# EAGLE board MagEnc2 (EAGLE 6.1)
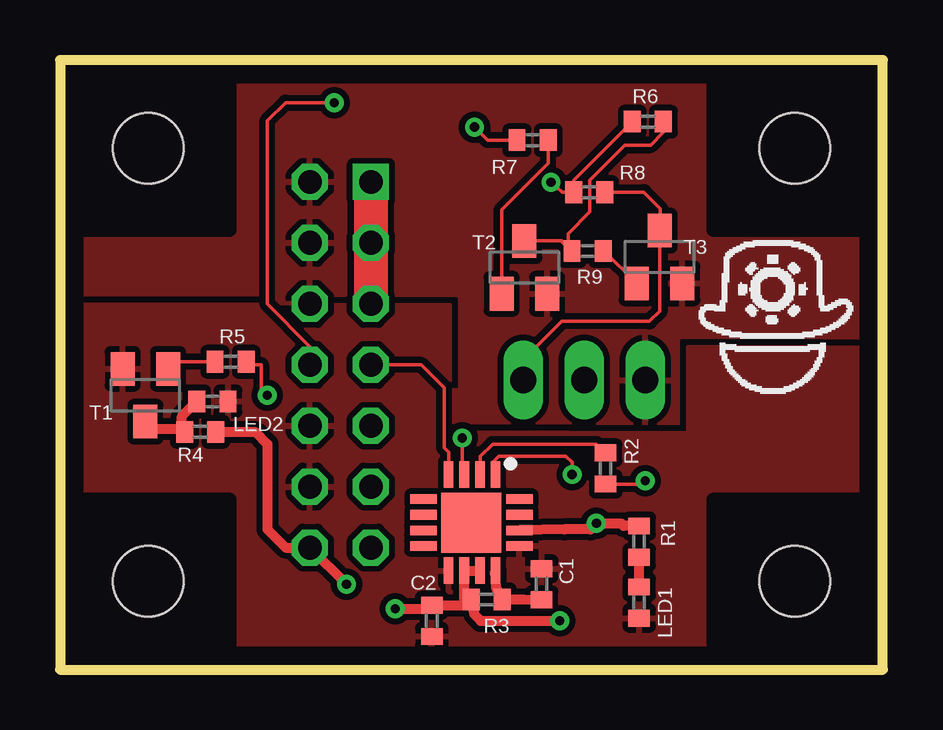
[diagram p0: board, top side]
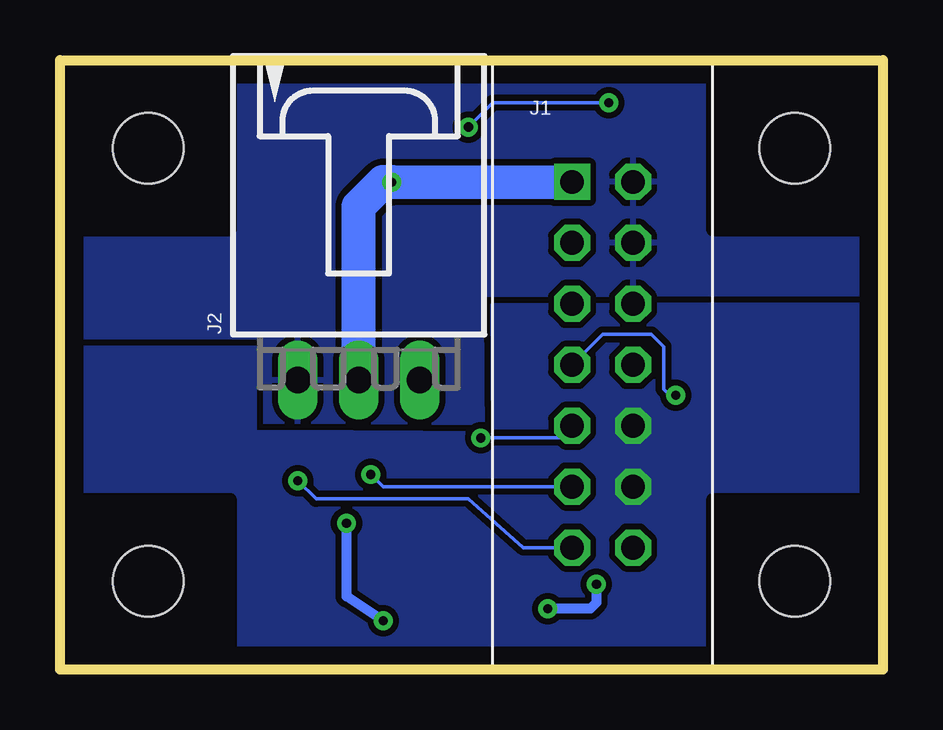
[diagram p1: board, bottom side, seen from below]

Size 34.29 x 25.4 mm. Coordinates in mm from the lower left corner, seen from the top.
Outline: 0,0 34.29,0 34.29,25.4 0,25.4 0,0
Copper layers (1*16): Top 0.035mm / dielectric 1.5mm / Bottom 0.035mm
Design rules: minimum track width 6mil, minimum drill 15mil, track to track 6mil, track to pad 6mil, pad to pad 6mil, via to via 6mil, smd to smd 6mil, copper to edge 30mil, drill to drill 30mil, minimum pad ring 10mil, minimum via ring 8mil, stop-mask expansion 1mil, vias tented up to drill 0mil, thermal gap 10mil
Holes 2.95 mm at 3.68,21.72 30.61,21.72 30.61,3.68 3.68,3.68
tRestrict: area 0,0 to 7.1,7.1; area 27.2,0.3 to 34.3,7.1; area 27.2,18.3 to 34.3,25.4; area 0,18.3 to 7.1,25.4
bRestrict: area 0.3,0.3 to 7.1,7.1; area 0,18.3 to 7.1,25.4; area 27.2,18.3 to 34.3,25.4; area 27.2,0 to 34.3,7.1

## Footprints (pad centres in the part's own frame; a part is rotated, then mirrored left to right if it is on the bottom)
C0402 = smd 0.7 x 0.9: 1 -0.65,0; 2 0.65,0
SBH11-PBPC-D07-ST-BK = drill 0.991 square: 1 0,0 | drill 0.991 octagon: 2 2.54,0; 3 0,-2.54; 4 2.54,-2.54; 5 0,-5.08; 6 2.54,-5.08; 7 0,-7.62; 8 2.54,-7.62; 9 0,-10.16; 10 2.54,-10.16; 11 0,-12.7; 12 2.54,-12.7; 13 0,-15.24; 14 2.54,-15.24
70553-03 = drill 1.092 long: 1 -2.54,-7.62; 2 0,-7.62; 3 2.54,-7.62
R0402 = smd 0.7 x 0.9: 1 -0.65,0; 2 0.65,0
SOT23-BEC = smd 1 x 1.4: B -0.95,-1.1; C 0,1.1; E 0.95,-1.1
AS5055 = smd 1.1 x 0.4: 1 0,1.95; 2 0,1.3; 3 0,0.65; 4 0,0; 9 4,0; 10 4,0.65; 11 4,1.3; 12 4,1.95 | smd 0.4 x 1.1: 5 1.025,-1.05; 6 1.675,-1.05; 7 2.325,-1.055; 8 2.975,-1.055; 13 2.975,2.945; 14 2.325,2.945; 15 1.675,2.95; 16 1.025,2.95 | smd 2.5 x 2.5: EPAD 2,0.95

## Placement (x,y rotation side)
C1  4.7u  [C0402]  20.07,3.56 90 top
C2  100n  [C0402]  15.49,2.03 270 top
J1  SBH11-PBPC-D07-ST-BK  [SBH11-PBPC-D07-ST-BK]  12.95,20.32 0 bottom
J2  70553-0037  [70553-03]  21.84,19.68 0 bottom
LED1  GREEN  [R0402]  24.13,2.79 270 top
LED2  GREEN  [R0402]  6.35,11.18 0 top
R1  680  [R0402]  24.13,5.33 270 top
R2  33  [R0402]  22.73,8.38 270 top
R3  15  [R0402]  17.78,2.92 0 top
R4  1K  [R0402]  5.84,9.91 180 top
R5  1K  [R0402]  7.11,12.83 0 top
R6  1K  [R0402]  24.49,22.83 0 top
R7  1K  [R0402]  19.69,22.06 180 top
R8  1K  [R0402]  22.05,19.89 0 top
R9  1K  [R0402]  21.98,17.44 180 top
T1  MMBT2222A  [SOT23-BEC]  3.56,11.43 180 top
T2  MMBT2222A  [SOT23-BEC]  19.35,16.76 0 top
T3  MMBT2222A  [SOT23-BEC]  24.98,17.19 0 top
U$2  AS5055  [AS5055]  16.2,8.13 270 top

## Library data of the parts
C1 C2 LED1 LED2 R1-R9 = resistor
J1 = SBH11-PBPC-D07-ST-BK
J2 = con-molex; OC_FARNELL: unknown; OC_NEWARK: unknown
T1-T3 = transistor
U$2 = AS5055

## Nets
5V_SERVO: J1.1 J1.3 J1.5 J2.2 R6.1 R8.1
5V_SERVO_CTRL: J2.3 R8.2 T3.C
CSN: J1.7 R5.2 U$2.4
CSN1: R6.2 R9.2 T2.C
DGND: C1.2 C2.2 J1.10 J1.12 LED1.2 LED2.2 T1.E U$2.9 U$2.13
GND: J1.2 J1.4 J1.6 J2.1 T2.E T3.E
MISO: J1.13 R2.2
MOSI: J1.11 U$2.1
N$1: LED1.1 R1.2
N$2: LED2.1 R4.2 T1.C
N$3: R5.1 T1.B
N$4: R2.1 U$2.2
N$6: R7.1 T2.B
N$8: R9.1 T3.B
SCLK: J1.9 U$2.3
SERVO_CTRL: J1.8 R7.2
VCC: C2.1 J1.14 R1.1 R3.1 R4.1 U$2.10 U$2.11 U$2.14
VDD: C1.1 R3.2 U$2.12

## Tracks (layer width: path | path; a pad name or v marks a point on that pad's centre or on a via)
5V_SERVO  (via drill 0.38)
  Top 0.152: R6.1 21.4,20.39 R8.1 20.92,19.89 v20.46,20.31
  Top 1.422: J1.1 J1.3 J1.5
  Bottom 1.422: J2.2 21.84,19.3 20.83,20.32 v20.46,20.31 J1.1
5V_SERVO_CTRL
  Top 0.152: R8.2 24.33,19.89 25.02,19.2 25.02,18.33 T3.C 24.98,14.93 24.56,14.51 20.9,14.51 19.31,12.92 J2.3
CSN  (via drill 0.38)
  Top 0.152: R5.2 7.89,12.7 8.38,12.7 8.38,11.68 v8.64,11.43 | U$2.4 16.2,9.05 16,9.25 16,11.75 15.05,12.7 J1.7
  Bottom 0.152: J1.7 11.68,13.97 9.65,13.97 9.14,13.46 9.14,11.68 8.89,11.43 v8.64,11.43
CSN1
  Top 0.152: T2.C 20.91,17.86 | 20.91,17.86 R9.2 | 20.91,17.86 20.91,17.83 21.17,17.57 21.17,18.16 22.08,19.07 22.08,20.4 23.53,21.85 24.61,21.85 25.14,22.38 25.14,22.8 25.21,22.87 25.21,22.82 25.22,22.81 25.16,22.81 R6.2
DGND
  pour Top (isolate 0.254): 10.71,15.21 16.26,15.21 16.26,9.91 26.16,9.88 26.16,13.46 arc-1 34.17,13.43 34.43,0.02 0.38,0.27 0.38,3.3 0.26,15.21 10.7,15.21
  pour Bottom (isolate 0.254, no thermals): 16.3,15.21 16.26,9.88 22.1,9.91 26.16,9.91 26.16,13.46 34.3,13.43 34.3,-0.11 0.38,0.14 0.38,3.05 0.26,15.21 9.93,15.21
GND
  pour Top (isolate 0.254, rank 2): 0.13,15.24 16.26,15.24 16.26,9.91 26.16,9.91 26.16,13.46 34.54,13.46 34.04,25.4 0.25,25.4
  pour Bottom (isolate 0.254, rank 2): 0.25,25.4 0.25,15.24 16.26,15.24 16.26,9.91 26.16,9.91 26.16,13.46 34.29,13.46 34.29,25.27
MISO  (via drill 0.38)
  Top 0.152: v24.38,7.87 24.27,7.73 R2.2
  Bottom 0.152: J1.13 14.99,5.08 17.27,7.11 23.62,7.11 v24.38,7.87
MOSI  (via drill 0.38)
  Top 0.152: v21.34,8.13 21.34,8.64 21.08,8.89 18.28,8.89 18.03,8.64 18.03,8.21 U$2.1
  Bottom 0.152: J1.11 20.83,7.62 v21.34,8.13
N$1
  Top 0.406: LED1.1 R1.2
N$2
  Top 0.406: 5.08,10.02 R4.2 | 5.08,10.02 3.87,10.02 T1.C | 5.08,10.02 5.08,10.56 LED2.1
N$3
  Top 0.152: R5.1 4.8,12.83 T1.B
N$4
  Top 0.152: U$2.2 17.52,8.16 17.52,8.89 18.03,9.4 22.35,9.4 22.73,9.02 R2.1
N$6
  Top 0.152: T2.B 18.4,19.16 20.34,21.1 R7.1
N$8
  Top 0.152: R9.1 22.68,17.44 T3.B
SCLK  (via drill 0.38)
  Top 0.152: v16.76,9.65 16.76,9.49 16.75,9.49 16.75,8.25 16.84,8.25 U$2.3
  Bottom 0.152: J1.9 13.46,9.65 v16.76,9.65
SERVO_CTRL  (via drill 0.38)
  Top 0.152: J1.8 10.41,13.46 8.64,15.24 8.64,22.86 9.4,23.62 v11.43,23.62 | R7.2 17.82,22.06 v17.27,22.61
  Bottom 0.152: v11.43,23.62 16.26,23.62 v17.27,22.61
VCC  (via drill 0.38)
  Top 0.406: U$2.11 U$2.10 16.84,2.92 R3.1 | 24.14,6.1 R1.1 23.48,5.98 23.37,6.1 v22.35,6.1 22.1,5.84 21.02,5.84 U$2.14 | R4.1 8.13,9.91 8.64,9.4 8.64,5.84 9.4,5.08 J1.14 v11.94,3.56 | v20.83,2.03 17.53,2.03 17.27,2.29 R3.1 | v13.97,2.54 15.35,2.54 C2.1 17.13,2.68 R3.1
  Bottom 0.406: v20.83,2.03 22.35,3.05 v22.35,6.1 | v11.94,3.56 11.94,2.79 12.19,2.54 v13.97,2.54
VDD
  Top 0.406: C1.1 19.32,2.92 R3.2 18.18,3.4 U$2.12

## Text on the board
Graphics: Neuron Robotics | Magnetic Encoder | Rev. 9 | Francesco Bivona | Mounting holes are 4-40 (0.116")